# EAGLE board HCLA (EAGLE 6.5.0)
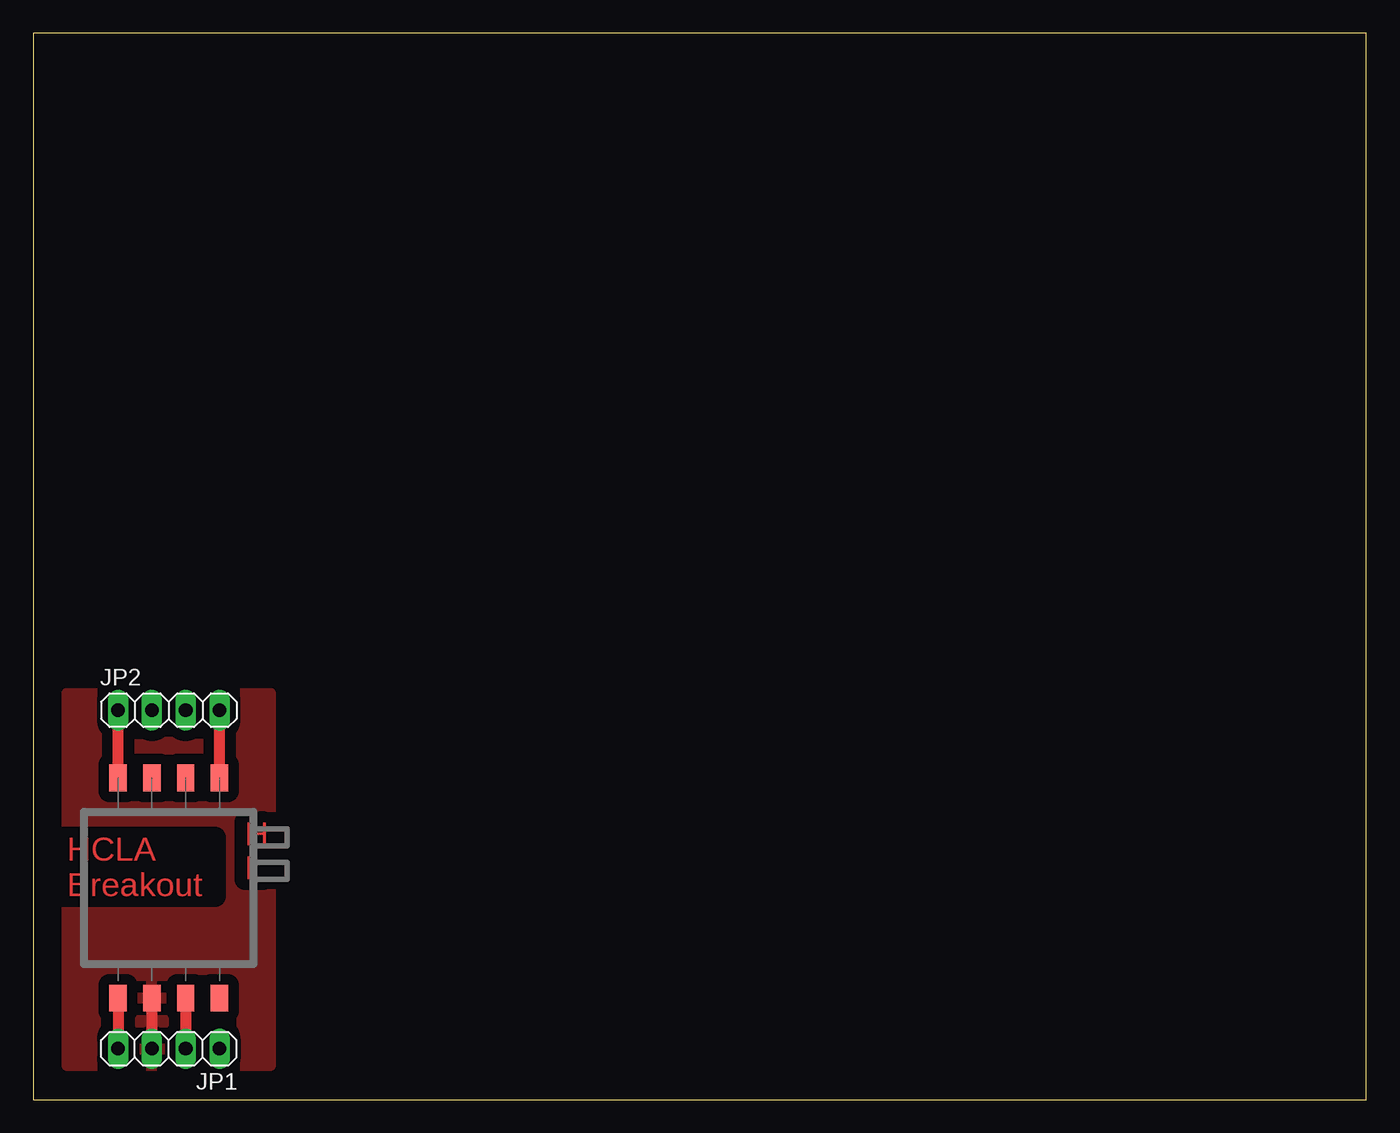
[diagram p0: board, top side]

Size 100 x 80 mm. Coordinates in mm from the lower left corner, seen from the top.
Outline: 0,0 100,0 100,80 0,80 0,0
Copper layers (1*16): Top 0.035mm / dielectric 1.5mm / Bottom 0.035mm
Design rules "default": minimum track width 10mil, minimum drill 24mil, track to track 8mil, track to pad 8mil, pad to pad 8mil, via to via 8mil, smd to smd 8mil, copper to edge 40mil, drill to drill 8mil, minimum pad ring 10mil, minimum via ring 8mil, stop-mask expansion 4mil, vias tented up to drill 0mil, thermal gap 10mil

## Footprints (pad centres in the part's own frame; a part is rotated, then mirrored left to right if it is on the bottom)
1X04 = drill 1.016 long: 1 -3.81,0; 2 -1.27,0; 3 1.27,0; 4 3.81,0
HCLA = smd 1.3 x 2: P$1 -20.32,-11.43; P$2 -17.78,-11.43; P$3 -15.24,-11.43; P$4 -12.7,-11.43; P$5 -12.7,5.08; P$6 -15.24,5.08; P$7 -17.78,5.08; P$8 -20.32,5.08

## Placement (x,y rotation side)
JP1  [1X04]  10.16,3.81 180 top
JP2  [1X04]  10.16,29.21 0 top
U$1  HCLA  [HCLA]  26.67,19.05 0 top

## Library data of the parts
JP1 JP2 = pinhead
U$1 = HCLA

## Nets
+VS: JP1.4 U$1.P$1
GND: JP1.3 U$1.P$2
SCL: JP2.4 U$1.P$5
SDA: JP2.1 U$1.P$8
VOUT: JP1.2 U$1.P$3

## Tracks (layer width: path | path; a pad name or v marks a point on that pad's centre or on a via)
+VS
  Top 0.813: U$1.P$1 JP1.4
GND
  Top 0.813: U$1.P$2 JP1.3
  pour Top (isolate 0.813): 17.78,2.54 2.54,2.54 2.54,30.48 17.78,30.48
SCL
  Top 0.813: U$1.P$5 JP2.4
SDA
  Top 0.813: U$1.P$8 JP2.1
VOUT
  Top 0.813: U$1.P$3 JP1.2

## Text on the board
Top: H | L | HCLA / Breakout